# Altium PCB PCB1.PcbDoc (part 2 of 2)
Units mil, origin at the board's own origin, x right, y up, seen from the top; angles counter-clockwise.
Board outline 3865 x 2500 mil, 4 copper layers (Top Layer, GND, Power, Bottom Layer), stack 23.756 mil thick; 61 components, 57 nets, 224 pads, 39 vias.
Unrouted connection lines stored in the file: 58.
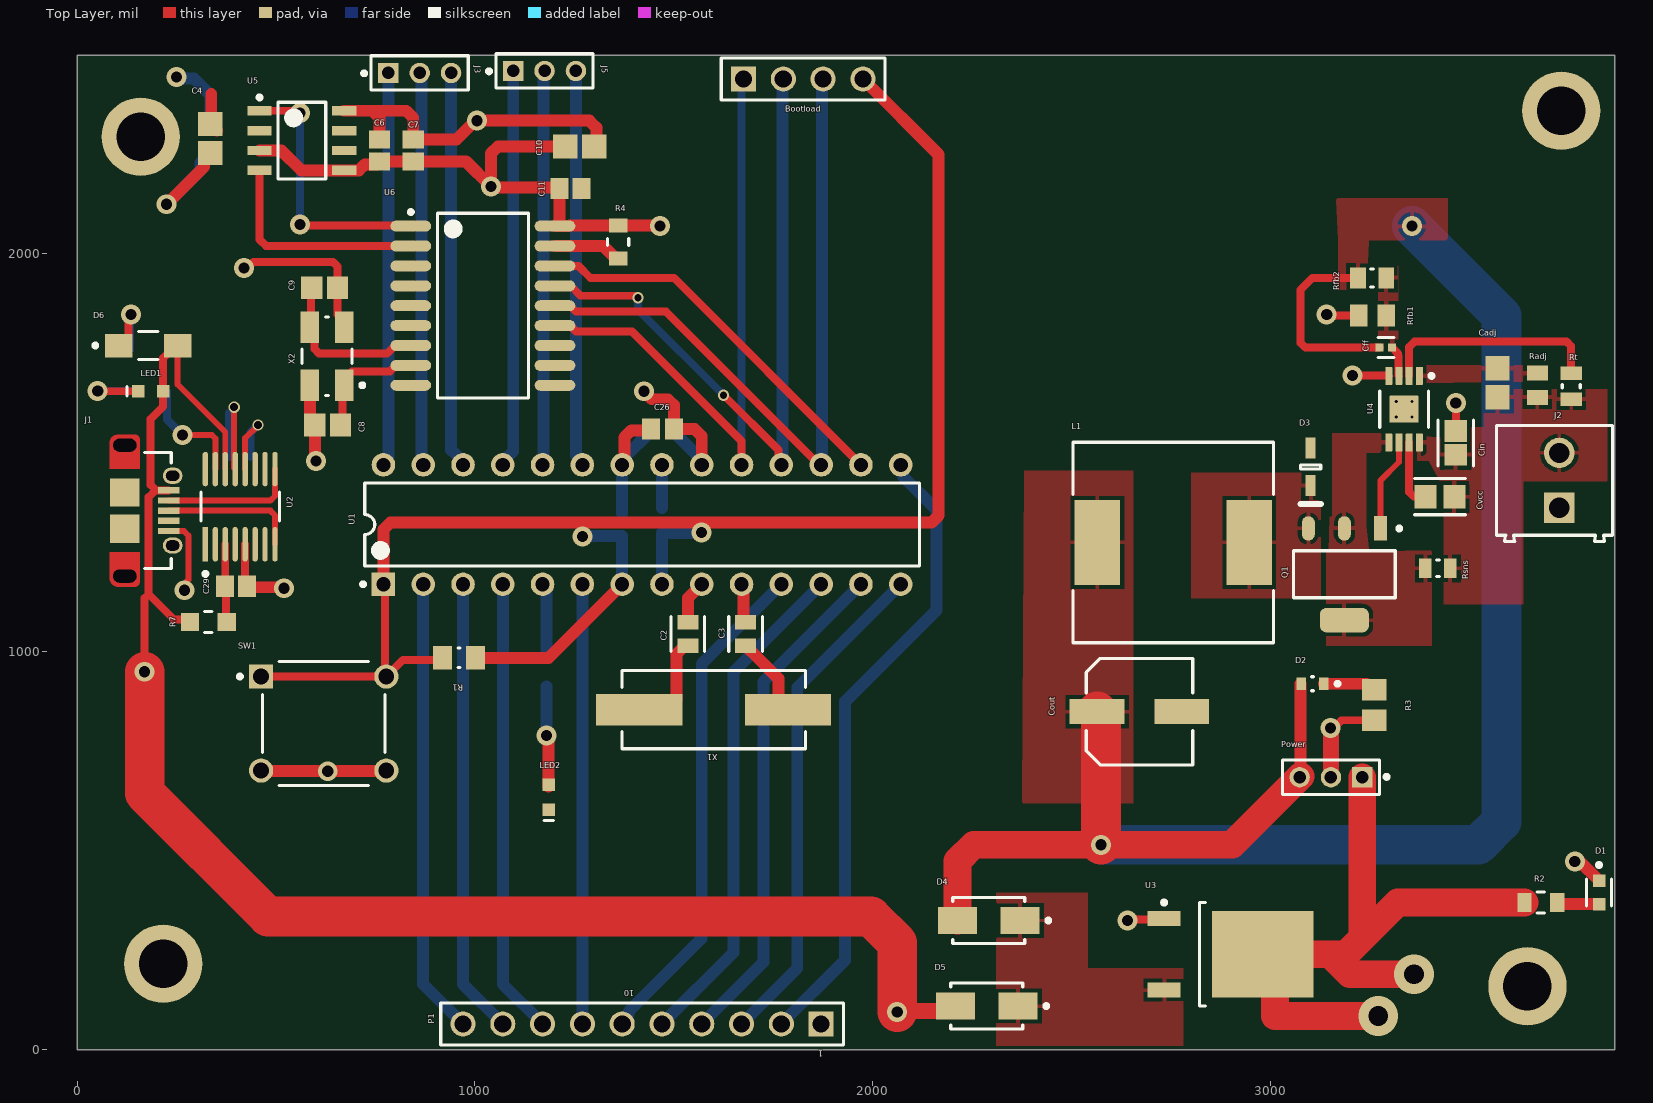
[diagram p0: Top Layer view]

## Via types
v1: diameter 50, hole 28, Top Layer to Bottom Layer, 29 vias
v2: diameter 15.75, hole 7.87, Top Layer to Bottom Layer, 4 vias
v3: diameter 100, hole 50, Top Layer to Bottom Layer, 2 vias
v4: diameter 28, hole 20, Top Layer to Bottom Layer, 2 vias
v5: diameter 28, hole 18, Top Layer to Bottom Layer, 2 vias

## Nets (pads, with @x,y where several pads share a name; then routed paths per layer and width w, separated by ;. In a path a pad name is that pad's centre, name@x,y a point inside that pad or via, vN(x,y) a via of type N, cw(c..) or ccw(c..) an arc to the next point about the centre after c; other vN are vias at no path point) (continued)
PIN_15: P1.2 U1.15 | length 1603.8
  Bottom Layer w30: P1.2 1930,225 1930,875 2160,1105 2160,1356.81 2075.56,1441.25 2075.56,1464.44 U1.15
PIN_17: Bootload.3 U1.17 U6.14 | length 1806.7
  Top Layer w20: U6.14 1239,1870 1254,1855 1480,1855 1865,1470 U1.17
  Bottom Layer w30: U1.17 1872.5,1472.5 1872.5,2437.5 Bootload.3
PIN_18: Bootload.2 U1.18 U6.15 | length 1762.5
  Top Layer w20: U6.15 1240.55,1920 1265.55,1895 1402.84,1895 1407.84,1890 v5(1410,1890) ; v5(1625,1645) 1762.91,1507.09 1762.91,1477.09 U1.18
  Bottom Layer w20: v5(1410,1890) 1410,1860 v5(1625,1645)
  Bottom Layer w30: U1.18 1772.5,1472.5 1772.5,2437.5 Bootload.2
PIN_19: Bootload.1 U1.19 U6.13 | length 1621.1
  Top Layer w20: U6.13 1239,1820 1254,1805 1395,1805 1670,1530 U1.19
  Bottom Layer w20: U1.19 1670,2435 Bootload.1
PIN_23: J5.3 U1.23 | length 996.7
  Bottom Layer w30: J5.3 1253.74,1494.12 1270,1477.86 U1.23
PIN_24: J5.2 U1.24 | length 992.1
  Bottom Layer w30: U1.24 1172.5,1472.5 1172.5,2457.5 J5.2
PIN_25: J5.1 U1.25 | length 1000.9
  Bottom Layer w30: U1.25 1070,1477.86 1096.26,1504.12 J5.1
PIN_26: J3.3 U1.26 | length 997.4
  Bottom Layer w30: J3.3 940,1507.86 970,1477.86 U1.26
PIN_27: J3.2 U1.27 | length 988.6
  Bottom Layer w30: J3.2 865.31,2450.95 865.31,1474.69 U1.27
PIN_28: J3.1 U1.28 | length 990.2
  Bottom Layer w30: U1.28 770,1477.86 782.52,1490.38 J3.1
RXD: U5.4 U6.2 | length 560.4
  Top Layer w20: U5.4 458.7,2036.72 475.42,2020 U6.2
TXD: U5.1 U6.1 | length 665.6
  Top Layer w20: U5.1 555,2360 v1(560.71,2354.29) ; v1(559.95,2073.93) 562.43,2071.45 837.45,2071.45 U6.1
  Bottom Layer w20: v1(559.95,2073.93) 560.71,2074.7 v1(560.71,2354.29)
USB_D+: J1.3 U2.8 | length 344.7
  Top Layer w15: J1.3 485.78,1355 497.5,1343.28 U2.8
USB_D-: J1.2 U2.9 | length 339.9
  Top Layer w15: J1.2 231.02,1380 485.78,1380 497.5,1391.72 U2.9
VIN: Cadj.1 Cin.1 Cvcc.1 J2.2 Radj.2 Rsns.2 Rt.2 U4.8
pads on no net: J1.4 J1.Shell P1.1 U2.1 U2.2 U2.4 U2.6 U2.7 U2.10 U2.11 U2.16 U4.9 U6.3 U6.4 U6.5 U6.6 U6.10 U6.11
copper on no net:
  other v2: 3315.31,1590.32 3354.68,1590.32 3315.31,1629.68 3354.68,1629.68

## Polygon pours and split planes (outlines as drawn)
NetD4_1 on Top Layer "5V" (solid, remove dead copper, pour order 25): 2525,205 2780,205 2780,10 2525,10
NetD4_1 on Top Layer "5V" (solid, remove dead copper, pour order 24): 2310,395 2325,395 2540,395 2540,10 2310,10
FB on Top Layer "5V" (solid, remove dead copper, pour order 23): 3270,1970 3320,1970 3320,1755 3315,1750 3310,1755 3295,1755 3295,1785 3290,1790 3270,1790
+5 on Top Layer "5V" (solid, remove dead copper, pour order 22): 3170,2035 3440,2035 3445,2040 3445,2140 3165,2140
+5 on Top Layer "5V" (solid, remove dead copper, pour order 21): 3240,1910 3170,1910 3170,2120 3250,2120
+5 on Top Layer "5V" (solid, remove dead copper, pour order 20): 2380.42,1455 2655,1455 2655,620 2375,620
NetD3_2 on Top Layer "5V" (solid, remove dead copper, pour order 19): 2800,1135 3125,1135 3125,1450 2800,1450
ISEN on Top Layer "5V" (solid, remove dead copper, pour order 18): 3155,1500 3155,1550 3305,1550 3305,1500
ISEN on Top Layer "5V" (solid, remove dead copper, pour order 17): 3155,1265 3160,1260 3240,1260 3240,1500 3155,1500
ISEN on Top Layer "5V" (solid, remove dead copper, pour order 16): 3405,1255 3405,1015 3140,1015 3140,1250.27
ISEN on Top Layer "5V" (solid, remove dead copper, pour order 15): 3147.77,1340 3237.23,1340 3272.23,1015 3140,1015
VIN on Top Layer "5V" (solid, pour order 14): 3365,1540 3365,1480 3410,1480 3410,1535 3415,1540
VIN on Top Layer "5V" (solid, remove dead copper, pour order 13): 3362.45,1545.3 3580,1520 3580,1440 3565,1455 3444.23,1392.2
NetCadj_2 on Top Layer "5V" (solid, remove dead copper, pour order 12): 3695,1680 3690,1720 3365,1720 3365,1675
VIN on Top Layer "5V" (solid, remove dead copper, pour order 11): 3435,1120 3435,1565 3440,1570 3445,1565 3635,1565 3635,1120
VIN on Top Layer "5V" (solid, remove dead copper, pour order 10): 3846.08,1428.92 3846.08,1660 3535,1660 3535,1428.92
no net on Top Layer "5V" (solid, pour order 2): 3240,1895

## Text inside footprints (layer, text, board x,y; h text height)
J1: Top 3D Body "PCB Edge" at 41.26,1398.31 h15 r270
P1: Top Overlay "10" at 1400,150 h15 r180; Top Overlay "1" at 1874.72,-1.93 h15 r180